# Altium PCB Therm_Expand_PCB.PcbDoc (part 2 of 2)
Units mm, origin at the board's own origin, x right, y up, seen from the top; angles counter-clockwise.
Board outline 68.45 x 50.23 mm, 2 copper layers (Top Layer, Bottom Layer); 54 components, 69 nets, 242 pads, 159 vias.
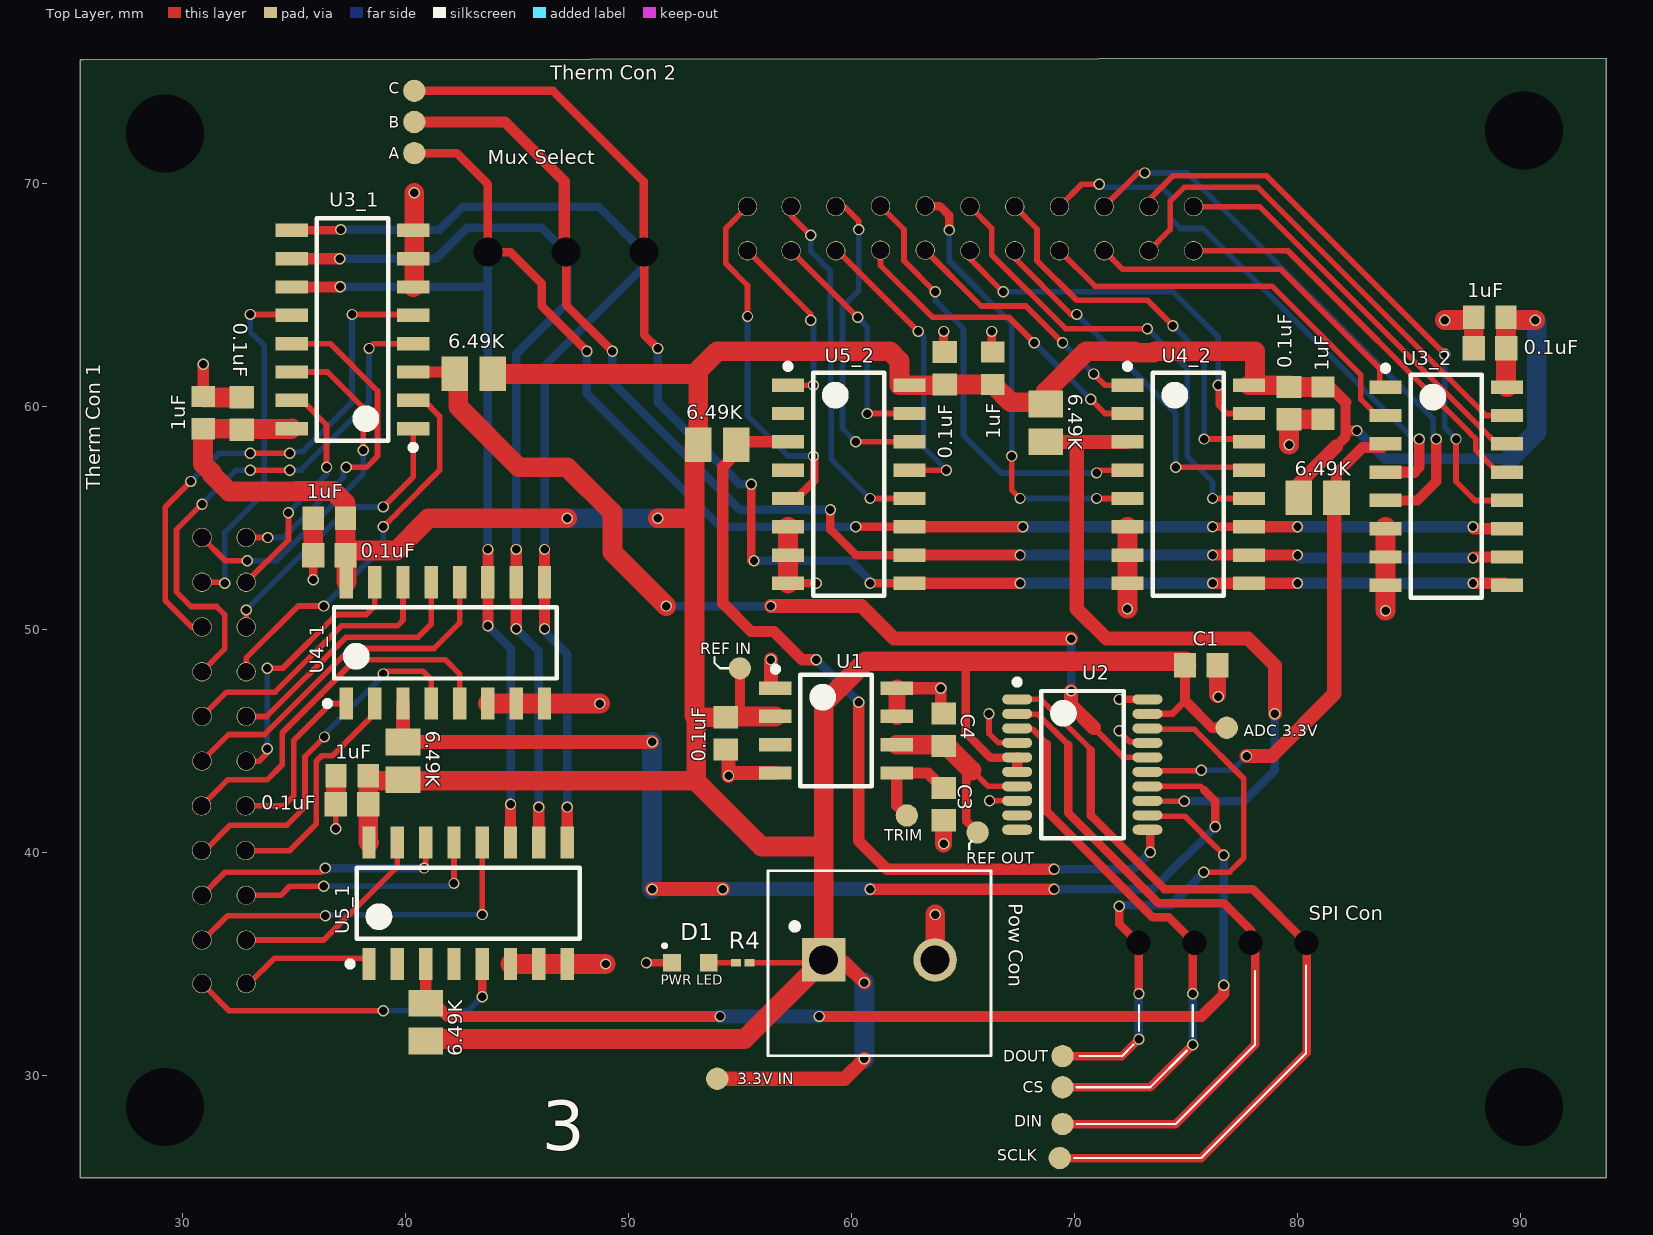
[diagram p0: Top Layer view]

## Via types
v1: diameter 0.508, hole 0.381, Top Layer to Bottom Layer, 159 vias

## Nets (pads, with @x,y where several pads share a name; then routed paths per layer and width w, separated by ;. In a path a pad name is that pad's centre, name@x,y a point inside that pad or via, vN(x,y) a via of type N, cw(c..) or ccw(c..) an arc to the next point about the centre after c; other vN are vias at no path point) (continued)
TS_IN18_1: (continued)
  Bottom Layer w0.381: v1(36.392,39.3) v1(40.824,39.3)
TS_IN18_2: "Therm Con 2.18" U5_2.14 | length 13.7
  Top Layer w0.254: 59.297,68.975 59.676,68.975 60.325,68.326 v1(60.325,67.945) ; v1(60.198,58.42) U5_2.14@62.154,58.42
  Bottom Layer w0.254: v1(60.198,58.42) 59.6,59.018 59.6,64.483 60.325,65.208 v1(60.325,67.945)
TS_IN19_1: "Therm Con 1.19" U5_1.15 | length 9.1
  Top Layer w0.254: 32.969,36.068 36.322,36.068 39.624,39.37 U5_1.15
TS_IN19_2: "Therm Con 2.19" U5_2.15 | length 10.2
  Top Layer w0.254: 57.291,66.994 v1(60.277,64.008) ; v1(60.706,59.69) U5_2.15@62.154,59.69
  Bottom Layer w0.254: v1(60.277,64.008) 60.706,63.579 v1(60.706,59.69)
TS_IN20_1: "Therm Con 1.20" U5_1.12 | length 16.3
  Top Layer w0.254: 30.861,36.068 30.912,36.068 32.004,37.16 v1(36.398,37.16) ; v1(43.434,37.211) U5_1.12
  Bottom Layer w0.254: v1(36.398,37.16) 36.449,37.211 v1(43.434,37.211)
TS_IN20_2: "Therm Con 2.20" U5_2.12 | length 15.9
  Top Layer w0.254: 57.291,68.975 57.291,68.566 v1(58.166,67.691) ; v1(60.833,55.88) U5_2.12@62.154,55.88
  Bottom Layer w0.254: v1(58.166,67.691) 58.166,66.976 59.043,66.099 59.091,57.622 v1(60.833,55.88)
TS_IN21_1: "Therm Con 1.51" U5_1.1 | length 6
  Top Layer w0.254: 32.969,34.112 34.112,35.255 38.093,35.255 U5_1.1
TS_IN21_2: "Therm Con 2.51" U5_2.1 | length 8.8
  Top Layer w0.254: 55.335,66.994 58.166,64.163 v1(58.166,63.881) ; U5_2.1@56.704,60.96 U5_2.1 v1(58.293,60.96)
  Bottom Layer w0.254: v1(58.166,63.881) 58.293,63.754 v1(58.293,60.96)
TS_IN22_1: "Therm Con 1.22" U5_1.5 | length 14.8
  Top Layer w0.254: 30.861,34.112 32.08,32.893 v1(38.989,32.893)
  Top Layer w0.381: v1(43.434,33.528) U5_1.5
  Bottom Layer w0.254: v1(38.989,32.893) 42.799,32.893 v1(43.434,33.528)
TS_IN22_2: "Therm Con 2.22" U5_2.5 | length 16.5
  Top Layer w0.254: v1(55.335,64.045) 55.335,65.442 54.356,66.421 54.356,67.996 55.335,68.975
  Top Layer w0.381: U5_2.5 57.534,55.88 58.319,56.666 58.319,57.759 v1(58.293,57.785)
  Bottom Layer w0.254: v1(55.335,64.045) 55.335,59.6 57.15,57.785 v1(58.293,57.785)
Vref: "REF OUT.1" C4.2 U1.6 U2.7 | length 9.3
  Top Layer w0.254: 65.151,43.446 65.383,43.678 65.399,43.694 66.126,42.967 U2.7
  Top Layer w0.381: 65.151,43.446 65.151,41.402 65.659,40.894
  Top Layer w0.889: U1.6 64.082,44.831 C4.2 64.284,44.778 65.383,43.678
pads on no net: S1.1 S2.1 S3.1 S4.1 TP19.1 U1.3 U2.9 U2.10 U5_1.2 U5_1.4 U5_2.2 U5_2.4

## Polygon pours and split planes (outlines as drawn)
GND on Bottom Layer "GND" (solid, remove dead copper, pour order 0): 93.853,75.565 25.4,75.565 25.4,25.4 93.472,25.4 94.107,26.035 93.853,26.289

## Silkscreen, mask and mechanical layers (free items; w line width, h text height)
Top Overlay:
  lines w0.1: 53.848,48.768 53.848,48.514 54.102,48.26 54.483,48.26 ; 65.278,40.132 65.278,40.386 65.405,40.513 ; 69.977,26.289 75.692,26.289 80.391,30.988 80.391,34.925 ; 70.104,27.813 74.549,27.813 78.105,31.369 78.105,34.671 ; 70.104,29.464 73.406,29.464 75.057,31.115 ; 70.231,30.861 72.136,30.861 72.644,31.369 ; 72.898,32.004 72.898,33.147 ; 75.311,31.75 75.311,33.147
  text "PWR LED" at 51.435,33.909 h0.76
  text "3" at 46.101,25.908 h3.81